# Altium PCB PCB_proyect.PcbDoc
Units mil, origin at the board's own origin, x right, y up, seen from the top; angles counter-clockwise.
Board outline 2370 x 1410.97 mil, 2 copper layers (Top Layer, Bottom Layer), stack 6.737 mil thick; 39 components, 36 nets, 164 pads, 73 vias.
Unrouted connection lines stored in the file: 39.
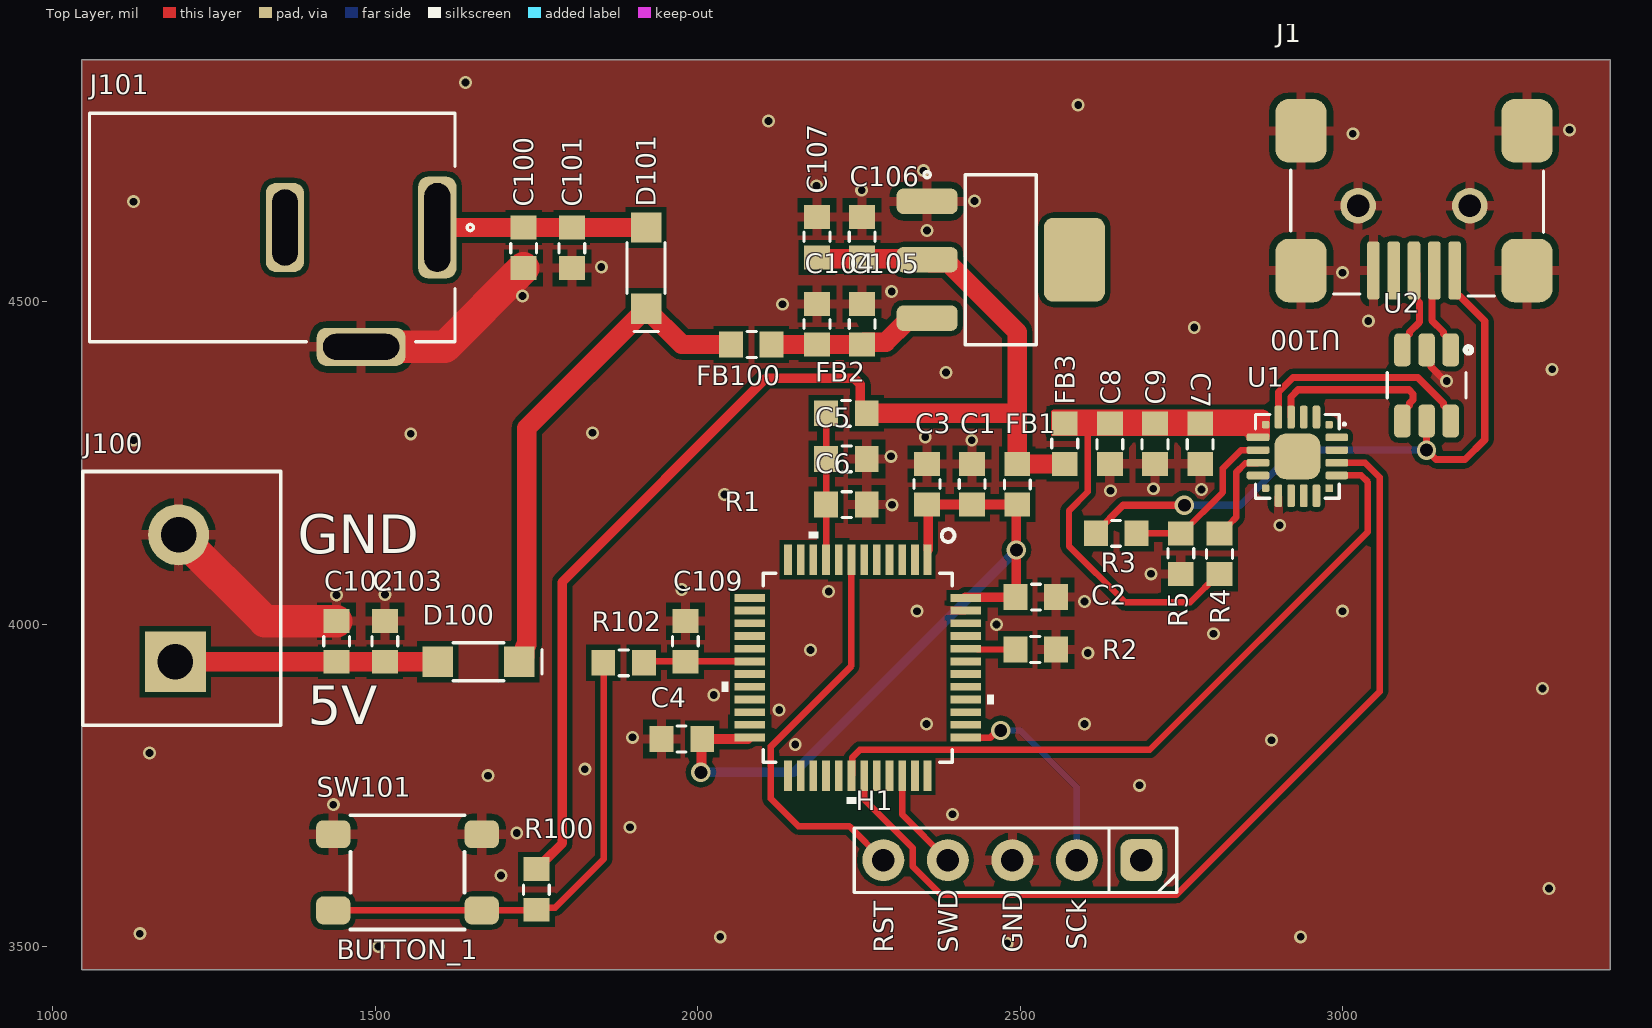
[diagram p0: Top Layer view]
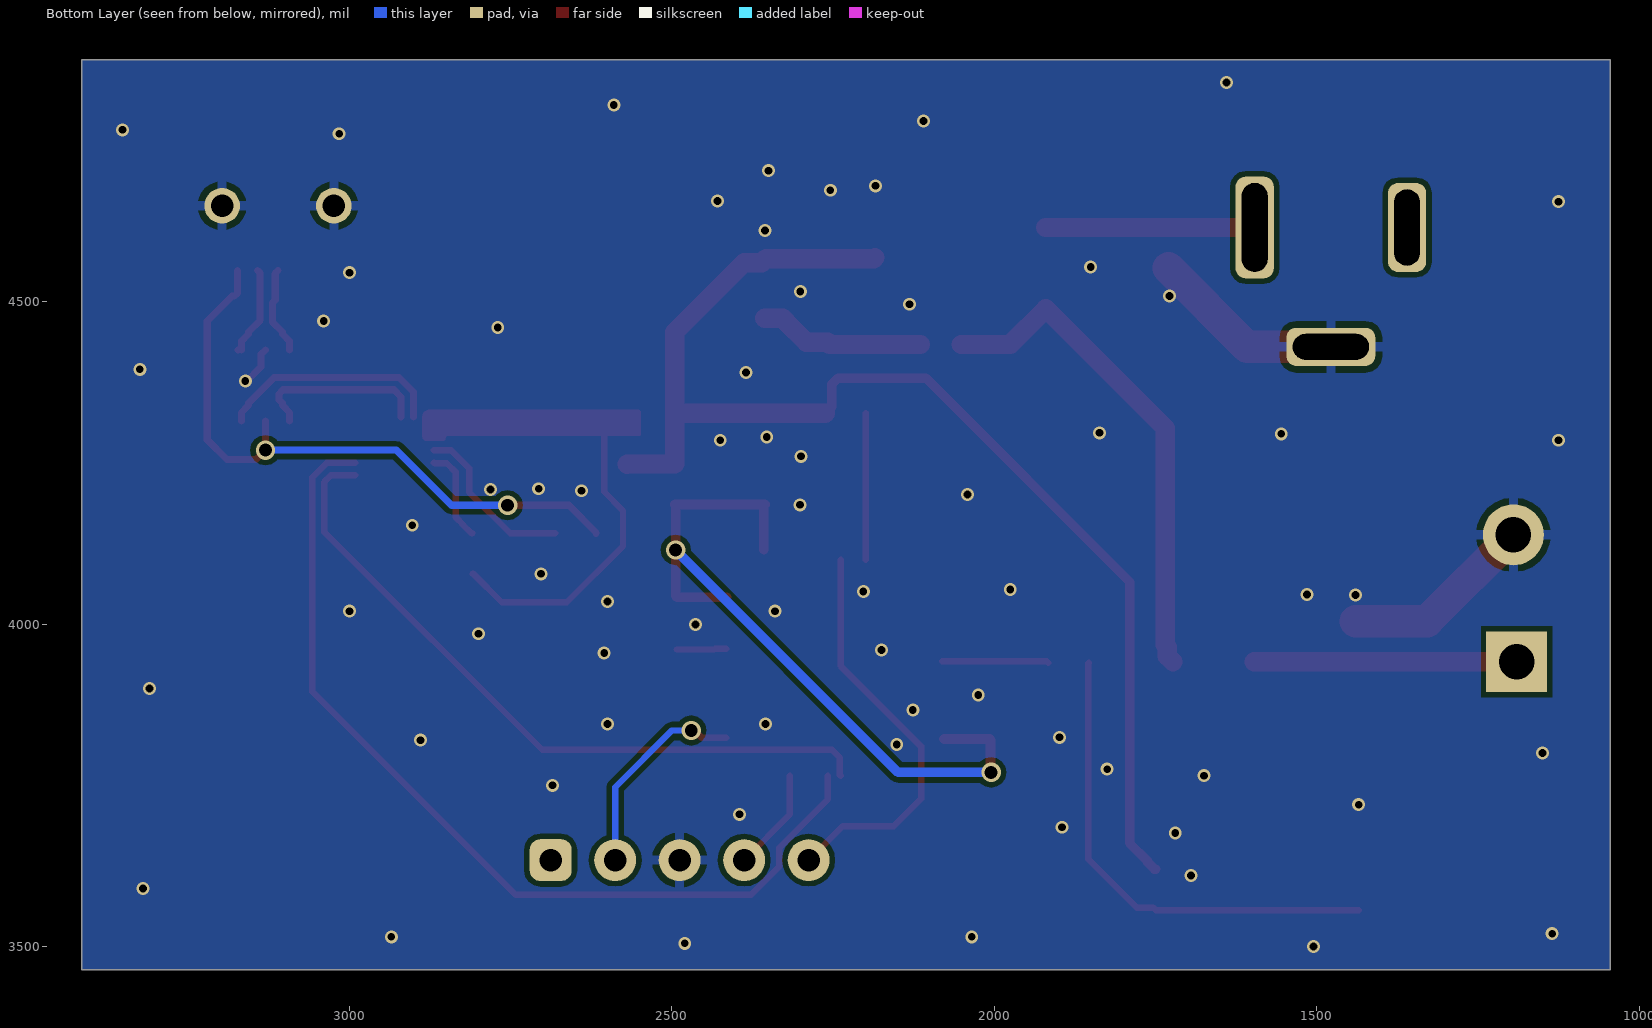
[diagram p1: Bottom Layer view, seen from below]
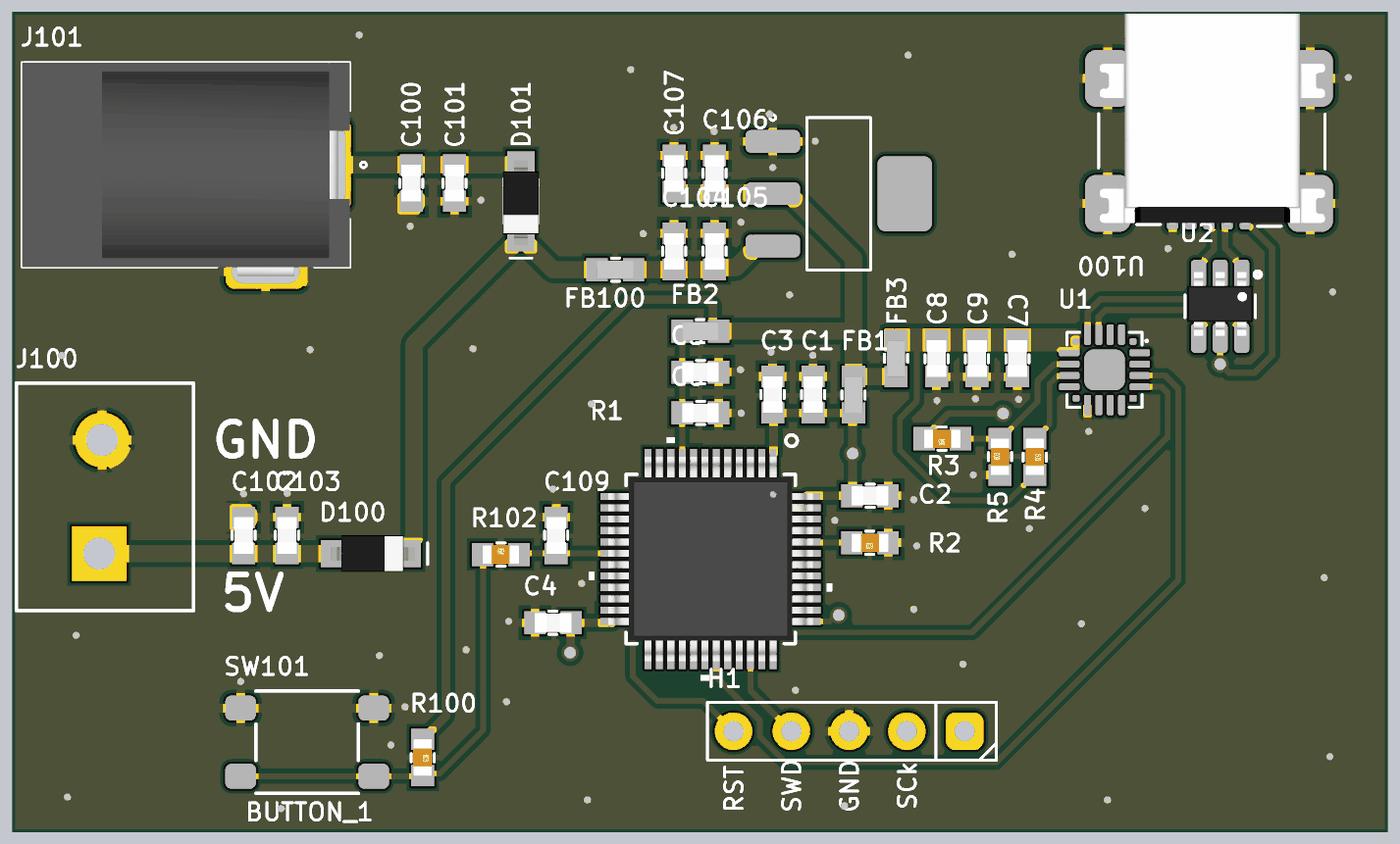
[diagram p2: 3D render of the assembled board from above, using the file's embedded part models]

## Layer stack, top to bottom
Top Solder: solder mask 0.4, Solder Resist, Dk 3.5
Top Layer: signal copper 1.4
Dielectric 1: dielectric 3.937, FR-4, Dk 4.6
Bottom Layer: signal copper 1.4
Bottom Solder: solder mask 0.4, Solder Resist, Dk 3.5

## Board outline
1045,3464.03 1045,4875 3415,4875 3415,3464.03

## Design rules (kind name [scope] priority, off if disabled: settings)
Clearance Clearance_MCU [InComponent('R1') OR InComponent('U1')] p1: gap=7 ignorepadtopadclearanceinfootprint=FALSE
Clearance [All] p2: gap=8 ignorepadtopadclearanceinfootprint=FALSE
DiffPairsRouting [All] p1: maxlimit=8 minlimit=8 mostfreqgap=8 toplayer_minwidth=11 toplayer_maxwidth=17.12 toplayer_prefwidth=17.12 bottomlayer_minwidth=11 bottomlayer_maxwidth=17.12 bottomlayer_prefwidth=17.12 impedanceprofiledriven=TRUE impedanceprofileid={F0EB9C77-73B7-45B8-9CEB-0A602036E387} impedanceprofilevalue=50.000000 maxuncoupledlength=500
HoleSize [All] p1: absolutevalues=TRUE maxlimit=100 minlimit=10 maxpercent=80.000 minpercent=20.000
MinimumSolderMaskSliver [All] p1: minsoldermaskwidth=1
PolygonConnect PolygonConnect_Via [IsVia] p1: connectstyle=Direct reliefconductorwidth=10 reliefentries=4 polygonreliefangle="90 Angle" airgapwidth=10
PolygonConnect [All] p2: connectstyle=Relief reliefconductorwidth=15 reliefentries=4 polygonreliefangle="90 Angle" airgapwidth=10
RoomDefinition POWER_LOADS [InComponentClass('POWER_LOADS')] p1: confinementstyle=ConfineIn formatcopy=TRUE lockcomponents=FALSE outline 155,0 7610,0 7610,5785 155,5785
RoomDefinition FLASH_UART [InComponentClass('FLASH_UART')] p2: confinementstyle=ConfineIn formatcopy=TRUE lockcomponents=FALSE outline 0,0 8090,0 8090,5830 0,5830
RoomDefinition MCU [InComponentClass('MCU')] p3: confinementstyle=ConfineIn formatcopy=TRUE lockcomponents=FALSE outline 0,0 10451.5,0 10451.5,5330 0,5330
RoutingVias [All] p1: holewidth=12 width=20 viastyle="Through Hole" minholewidth=12 minwidth=20 maxholewidth=28 maxwidth=50
SilkToSilkClearance [All] p1: silktosilkclearance=1
SilkToSolderMaskClearance [IsPad] p1: minsilkscreentomaskgap=1 clearancetoexposedcopper=TRUE
SolderMaskExpansion [All] p1: expansion=4 istentingtop=FALSE
Width Width_3v3 [InNet('3V3')] p1: maxlimit=60 minlimit=10 preferedwidth=30 minimp=50.000000 maximp=50.000000 favimp=50.000000
Width General_width [All] p2: maxlimit=100 minlimit=10 preferedwidth=10
25 further rules are at their usual default settings.

## Classes and differential pairs
component class POWER_LOADS: C100 C101 C102 C103 C104 C105 C106 C107 C109 D100 D101 FB100 J100 J101 R100 R102 SW101 U100
component class MCU: C1 C2 C3 C4 C5 C6 FB1 FB2 H1 R1 R2
component class FLASH_UART: C7 C8 C9 FB3 J1 R3 R4 R5 U1 U2
differential pair D: +NetJ1_3 -NetJ1_2
differential pair CP_D: +CP_D_P -CP_D_N

## Components (designator, comment, footprint, x,y, rotation, side; value= is the part's Value field where it differs from the comment)
C1 "22uF 6V3" 0603_cap 2425.59,4216.85 r90 top value=22uF
C2 "0.1uF 50V" 0603_cap 2524.09,4041.85 r0 top value=0.1uF
C3 "0.1uF 50V" 0603_cap 2355.59,4216.85 r90 top value=0.1uF
C4 "0.1uF 50V" 0603_cap 1975.59,3821.85 r180 top value=0.1uF
C5 "22uF 6V3" 0603_cap 2230.59,4256.1 r0 top value=22uF
C6 "0.1uF 50V" 0603_cap 2230.59,4185.35 r0 top value=0.1uF
C7 "10uF 10V" 0603_cap 2779.21,4279.55 r270 top value=10uF
C8 "0.1uF 50V" 0603_cap 2639.21,4279.55 r270 top value=0.1uF
C9 "0.1uF 50V" 0603_cap 2709.21,4279.55 r270 top value=0.1uF
C100 "10uF 10V" 0603_cap 1730,4583.5 r270 top value=10uF
C101 "0.1uF 50V" 0603_cap 1805,4583.5 r270 top value=0.1uF
C102 "10uF 10V" 0603_cap 1440,3973.07 r90 top value=10uF
C103 "0.1uF 50V" 0603_cap 1515,3973.07 r90 top value=0.1uF
C104 "10uF 10V" 0603_cap 2185,4465 r90 top value=10uF
C105 "0.1uF 50V" 0603_cap 2255,4465 r90 top value=0.1uF
C106 "10uF 10V" 0603_cap 2255,4600 r90 top value=10uF
C107 "0.1uF 50V" 0603_cap 2185,4600 r90 top value=0.1uF
C109 "0.1uF 50V" 0603_cap 1981.04,3973.07 r90 top value=0.1uF
D100 "40V 1A" SOD_123 1660,3941.57 r180 top
D101 "40V 1A" SOD_123 1920,4552.01 r90 top
FB1 "60OHM 2A" 0603_fb 2495.59,4216.85 r270 top value="60 OHM"
FB2 "60OHM 2A" 0603_fb 2230.59,4326.85 r180 top value="60 OHM"
FB3 "60OHM 2A" 0603_fb 2569.21,4279.55 r90 top value="60 OHM"
FB100 "60OHM 2A" 0603_fb 2083.21,4433.5 r0 top value="60 OHM"
H1 "H_5x1" H_5x1_TH_100mil 2487.94,3633.96 r270 top
J1 "USB Mini B" CON_5x1_SMD_miniUSB_B 3110.78,4656.55 r180 top
J100 "Connector 2pos" CON_2x1_TH_5MM 1200,4040 r90 top
J101 "PWR JACK 2.1mm" CON_POWER_BARREL_2.1MM_3CONN 1478.11,4615 r270 top
R1 "STM32F030C8T6TR" LQFP48_7x7mm 2248.27,3932.32 r270 top
R2 "10k 1/10W" 0603_res 2524.09,3960.6 r180 top value=10k
R3 "3k3 1/10W" 0603_res 2649.21,4140.71 r180 top value=3k3
R4 "10k 1/10W" 0603_res 2809.21,4109.21 r270 top value=10k
R5 "10k 1/10W" 0603_res 2749.21,4109.21 r90 top value=10k
R100 "1k 1/10W" 0603_res 1750,3588.5 r270 top value=1k
R102 "1k 1/10W" 0603_res 1885,3940 r0 top value=1k
SW101 "Sw" Sw_PUSH_4.5x4.5x5mm 1550,3615 r0 top
U1 "CP2102N-A02-GQFN20R" WFQFN_20_EP_3X3MM 2930,4260 r270 top
U2 "USBLC6-2SC6" SOT_23_6 3130.24,4370.13 r270 top
U100 "AMS1117-ADJ" SOT_223 2470,4565 r0 top

## Footprints (in the part's own frame and the unit in brackets; to place one, negate y for a bottom-side part, rotate by r counter-clockwise, add the part's x,y. Pads: shape width x height; smd on the part's side, far side on the other; paste and mask are expansions set on the pad)
0603_cap [mil]
  rect 37x40 smd: 1(-31.5,0) 2(31.5,0)
  silkscreen extent -7,-20 8,20, body extent -31,-17 31,17, height 34
0603_fb [mil]
  rect 37x40 smd: 1(-31.5,0) 2(31.5,0)
  silkscreen extent -7,-20 8,20, body extent -32,-16 31,16, height 32
0603_res [mil] "1608 Metric / 20190225 / C-A.Serna.A"
  rect 37x40 smd: 1(-31.5,0) 2(31.5,0)
  silkscreen extent -7,-20 8,20, body extent -31,-16 32,16, height 12
CON_2x1_TH_5MM [mm]
  rect 2.4x2.4 hole 1.4: 1(-2.5,0.254)
  round 2.4 hole 1.4: 2(2.5,0.127)
  silkscreen extent -5,-3.9 5,3.9, body extent -5,-3.9 5,3.9, height 10.2
CON_5x1_SMD_miniUSB_B [mm] "20190328 / V-A.Patino"
  rrect50% 2x2.5 smd: 0(-4.45,-2.75) 0(-4.45,2.75) 0(4.45,-2.75) 0(4.45,2.75)
  round 1.4 hole 0.889: 0(-2.2,0.2) 0(2.2,0.2)
  rrect50% 0.5x2.3 smd: 1(-1.6,2.75) 2(-0.8,2.75) 3(0,2.75) 4(0.8,2.75) 5(1.6,2.75)
  silkscreen extent -5.11,-1.2 4.85,3.76, body extent -5.1,-5.6 4.8,3.65, height 4
CON_POWER_BARREL_2.1MM_3CONN [mm]
  rrect50% 4x1.5 hole 1.016 slot 3.5 at 0 deg: 1(0,3)
  rrect50% 3.5x1.5 hole 1.016 slot 3 at 0 deg: 2(0,-3)
  rrect50% 1.5x3.5 hole 1.016 slot 3 at 90 deg: 3(4.7,0)
  silkscreen extent -4.5,-10.7 4.5,4.43, body extent -4.5,-10.7 4.9,3.7, height 11
H_5x1_TH_100mil [mil] "/ 20190222 / C-A.Serna.A"
  rrect50% 65x65 hole 35: 1(0,200)
  round 65 hole 35: 2(0,100) 3(0,0) 4(0,-100) 5(0,-200)
  silkscreen extent -50,-245 50,255
LQFP48_7x7mm [mil]
  rect 47x12 smd paste+0: 1(-167.32,108.27) 2(-167.32,88.58) 3(-167.32,68.9) 4(-167.32,49.21) 5(-167.32,29.53) 6(-167.32,9.84) 7(-167.32,-9.84) 8(-167.32,-29.53) 9(-167.32,-49.21) 10(-167.32,-68.9) 11(-167.32,-88.58) 12(-167.32,-108.27) 25(167.32,-108.27) 26(167.32,-88.58) 27(167.32,-68.9) 28(167.32,-49.21) 29(167.32,-29.53) 30(167.32,-9.84) 31(167.32,9.84) 32(167.32,29.53) 33(167.32,49.21) 34(167.32,68.9) 35(167.32,88.58) 36(167.32,108.27)
  rect 12x47 smd paste+0: 13(-108.27,-167.32) 14(-88.58,-167.32) 15(-68.9,-167.32) 16(-49.21,-167.32) 17(-29.53,-167.32) 18(-9.84,-167.32) 19(9.84,-167.32) 20(29.53,-167.32) 21(49.21,-167.32) 22(68.9,-167.32) 23(88.58,-167.32) 24(108.27,-167.32) 37(108.27,167.32) 38(88.58,167.32) 39(68.9,167.32) 40(49.21,167.32) 41(29.53,167.32) 42(9.84,167.32) 43(-9.84,167.32) 44(-29.53,167.32) 45(-49.21,167.32) 46(-68.9,167.32) 47(-88.58,167.32) 48(-108.27,167.32)
  silkscreen extent -215,-211 211,211, body extent -177,-177 177,177, height 63
SOD_123 [mm] "/ 20191030 / V-A.Patino"
  rect 1.2x1.2 smd: 1(-1.6,0) 2(1.6,0)
  silkscreen extent -2.5,-0.75 1,0.75, body extent -1.93,-0.8 1.77,0.8, height 1.28
SOT_23_6 [mm] "/ 20190225 / V-A.Patino"
  rrect50% 1.3x0.65 smd: 1(-1.4,0.95) 2(-1.4,0) 3(-1.4,-0.95) 4(1.4,-0.95) 5(1.4,0) 6(1.4,0.95)
  silkscreen extent -1.52,-1.55 0.5,1.78, body extent -1.5,-1.45 1.3,1.45, height 1.45
SOT_223 [mm] "TO-261-4, TO-261AA / 20220901/ V-A.Patino"
  rrect50% 2.4x1 smd: 1(-2.9,2.3) 2(-2.9,0) 3(-2.9,-2.3)
  rrect30% 2.4x3.3 smd: 4(2.9,0)
  silkscreen extent -3.02,-3.35 1.4,3.47, body extent -1.86,-3.35 1.86,3.35, height 1.8
Sw_PUSH_4.5x4.5x5mm [mm]
  rrect50% 1.35x1.1 smd: 1(-2.925,1.5) 1(2.925,1.5) 2(-2.925,-1.5) 2(2.925,-1.5)
  silkscreen extent -2.25,-2.25 2.25,2.25, body extent -2.25,-2.25 2.25,2.25, height 5
WFQFN_20_EP_3X3MM [mm] "QFN_20/ 20210809/ V-A.Patino"
  rrect50% 0.3x0.3 smd: 1(-1.25,1.25) 6(-1.25,-1.25) 11(1.25,-1.25)
  rrect50% 0.9x0.3 smd: 2(-1.55,0.75) 3(-1.55,0.25) 4(-1.55,-0.25) 5(-1.55,-0.75) 12(1.55,-0.75) 13(1.55,-0.25) 14(1.55,0.25) 15(1.55,0.75)
  rrect50% 0.3x0.9 smd: 7(-0.75,-1.55) 8(-0.25,-1.55) 9(0.25,-1.55) 10(0.75,-1.55) 17(0.75,1.55) 18(0.25,1.55) 19(-0.25,1.55) 20(-0.75,1.55)
  rect 0.3x0.3 smd: 16(1.25,1.25)
  rrect50% 1.8x1.8 smd: 21(0,0)
  silkscreen extent -1.65,-1.65 1.65,1.9, body extent -1.5,-1.5 1.5,1.5, height 0.8

## Part data
C1 C5: library part Cap_22uF_0805_6V3, "6.3V 22uF X5R ±20% 0805 Multilayer Ceramic Capacitors MLCC - SMD/SMT ROHS", Manufacturer="Samsung Electro-Mechanics", Manufacturer Part Number=CL21A226MQQNNNE, Supplier Part Number 1=C5674, ComponentLink1Description=LCSC, ComponentLink1URL=https://www.lcsc.com/product-detail/Multilayer-Ceramic-Capacitors-MLCC-SMD-SMT_Samsung-Electro-Mechanics-CL21A226MQQNNNE_C5674.html, Supplier 1=LCSC
C2 C3 C4 C6 C8 C9 C101 C103 C105 C107 C109: library part Cap_0.1uF_0603_50V, "50V 100nF Y5V -20%~+80% 0603 Multilayer Ceramic Capacitors MLCC - SMD/SMT ROHS", Manufacturer="Walsin Tech Corp", Manufacturer Part Number=0603F104Z500CT, Supplier Part Number 1=C83060, ComponentLink1Description=LCSC, ComponentLink1URL=https://www.lcsc.com/product-detail/Multilayer-Ceramic-Capacitors-MLCC-SMD-SMT_Walsin-Tech-Corp-0603F104Z500CT_C83060.html, Supplier 1=LCSC
  C109: Usage=NM
C7 C100 C102 C104 C106: library part Cap_10uF_0603_10V, "10V 10uF X5R ±10% 0603 Multilayer Ceramic Capacitors MLCC - SMD/SMT ROHS", Manufacturer=CCTC, Manufacturer Part Number=TCC0603X5R106K100CT, Supplier Part Number 1=C380314, ComponentLink1Description=LCSC, ComponentLink1URL=https://www.lcsc.com/product-detail/Multilayer-Ceramic-Capacitors-MLCC-SMD-SMT_CCTC-TCC0603X5R106K100CT_C380314.html, Supplier 1=LCSC
D100 D101: library part D_Schottky_40V_1A_SOD_123F, "DIODE SCHOTTKY 40V 1A SOD123F", Manufacturer="Shanghai Prisemi Elec", Manufacturer Part Number=PSBD1DF40V1H, Supplier Part Number 1=C110730, ComponentLink1Description=LCSC, ComponentLink1URL=https://www.lcsc.com/product-detail/Switching-Diode_Shanghai-Prisemi-Elec-PSBD1DF40V1H_C110730.html, Supplier 1=LCSC
FB1 FB2 FB3 FB100: library part FB_60_0603_2A, "2A 1 100mΩ 60Ω@100MHz ±25% 0603 Ferrite Beads ROHS", Manufacturer=TAI-TECH, Manufacturer Part Number=HCB1608KF-600T20, Supplier Part Number 1=C369516, ComponentLink1Description=LCSC, ComponentLink1URL=https://www.lcsc.com/product-detail/Ferrite-Beads_TAI-TECH-HCB1608KF-600T20_C369516.html, Supplier 1=LCSC
H1: library part H_Male_5x1_TH_100mil, "Debugging male pin", Last modified by=C-A.Serna.A, Last modified date=20190225
J1: library part Con_Mini_USB_B, "CONN RCPT USB2.0 MINI B SMD R/A", Manufacturer="EDAC Inc.", Manufacturer Part Number=KH-MINI-SMT-5P-Cu, Supplier Part Number 1=C2688795, ComponentLink1Description=LCSC, ComponentLink1URL=https://datasheet.lcsc.com/lcsc/2106070035_Shenzhen-Kinghelm-Elec-KH-MINI-SMT-5P-Cu_C2688795.pdf, Supplier 1=LCSC
J100: library part Con_2x1_TH_5mm, "2POS 5MM", Manufacturer=JILN, Manufacturer Part Number=JL126-50002G01, Supplier Part Number 1=C394556, ComponentLink1Description=Digi-Key, ComponentLink1URL=https://www.lcsc.com/product-detail/Screw-terminal_JILN-JL126-50002G01_C394556.html, Supplier 1=LCSC
J101: library part Con_Power_Jack_2.1mm_3pins, "CONN PWR JACK 2X5.5MM SOLDER", Manufacturer=HCTL, Manufacturer Part Number=HC-DC-005-2.0T, Supplier Part Number 1=C3010533, ComponentLink1Description=LCSC, ComponentLink1URL=https://www.lcsc.com/product-detail/AC-DC-Power-Connectors_HCTL-HC-DC-005-2-0T_C3010533.html, Supplier 1=LCSC
R1: library part IC_STM32F030C8T6TR_LQFP48_7x7MM, "IC MCU 32BIT 64KB FLASH 48LQFP", Manufacturer=STMicroelectronics, Supplier Part Number 1=C23922, ComponentLink1Description=LCSC, ComponentLink1URL=https://www.lcsc.com/product-detail/ST-Microelectronics_STMicroelectronics-STM32F030C8T6_C23922.html, Manufacturer Part Number=STM32F030C8T6TR, Supplier 1=LCSC
R2 R4 R5: library part Res_10k_0603_1/10W, "RES SMD 10k OHM 5% 1/10W 0603", Manufacturer=FOJAN, Manufacturer Part Number=FRC0603J103TS, Supplier Part Number 1=C2930027, ComponentLink1Description=LCSC, ComponentLink1URL=https://www.lcsc.com/product-detail/Chip-Resistor-Surface-Mount_FOJAN-FRC0603J103TS_C2930027.html, Supplier 1=LCSC
R3: library part Res_3k3_0603_1/10W, "RES SMD 3k3 OHM 5% 1/10W 0603", Manufacturer=FOJAN, Manufacturer Part Number="FRC0603J332 TS", Supplier Part Number 1=C2907140, ComponentLink1Description=LCSC, ComponentLink1URL=https://www.lcsc.com/product-detail/Chip-Resistor-Surface-Mount_FOJAN-FRC0603J332-TS_C2907140.html, Supplier 1=LCSC
R100 R102: library part Res_1k_0603_1/10W, "RES SMD 1k OHM 5% 1/10W 0603", Manufacturer=FOJAN, Manufacturer Part Number="FRC0603J102 TS", Supplier Part Number 1=C2907113, ComponentLink1Description=LCSC, ComponentLink1URL=https://www.lcsc.com/product-detail/Chip-Resistor-Surface-Mount_FOJAN-FRC0603J102-TS_C2907113.html, Supplier 1=LCSC
SW101: library part Sw_PUSH_4.5x4.5x5.0xmm, "SWITCH TACTILE SPST-NO 0.05A 12V", Manufacturer=BZCN, Manufacturer Part Number=TSC015A05026A, Supplier Part Number 1=C2888509, ComponentLink1Description=LCSC, ComponentLink1URL=https://www.lcsc.com/product-detail/Tactile-Switches_BZCN-TSC015A05026A_C2888509.html, Last modified by=N-A.Potosi, Last modified date=20190222, Supplier 1=LCSC
U1: library part IC_SGL_USB2UART-BRIDGE_20QFN, "IC USB TO UART BRIDGE QFN20", Manufacturer="Silicon Labs", Supplier Part Number 1=C969913, ComponentLink1Description=LCSC, ComponentLink1URL=https://www.lcsc.com/product-detail/USB-ICs_SILICON-LABS-CP2102N-A02-GQFN20R_C969913.html, Manufacturer Part Number=CP2102N-A02-GQFN20R, Supplier 1=LCSC
U2: library part TVS_5.25V_2CH_SOT_23_6, "TVS DIODE 5.25V 17V SOT23-6", Manufacturer=STMicroelectronics, Supplier Part Number 1=C7519, ComponentLink1Description=LCSC, ComponentLink1URL=https://www.lcsc.com/product-detail/ESD-Protection-Devices_STMicroelectronics-USBLC6-2SC6_C7519.html, Manufacturer Part Number=USBLC6-2SC6, Supplier 1=LCSC
U100: library part LDO_3V3_1A, "1A 70dB@(120Hz) 5mA 1.2V@1A Adjustable 1.2V~20V Positive 1 20V Output Adjustable SOT-223-3L Linear Voltage Regulators (LDO) ROHS", Manufacturer="WPMtek(Wei Pan Microelectronics)", Supplier Part Number=C2688238, ComponentLink1Description=LCSC, ComponentLink1URL=https://www.lcsc.com/product-detail/Linear-Voltage-Regulators-LDO_WPMtek-Wei-Pan-Microelectronics-AMS1117-ADJ_C2688238.html, Manufacturer Part Number=AMS1117-ADJ, Supplier=LCSC

## Via types
v1: diameter 20, hole 12, Top Layer to Bottom Layer, tented both sides, 68 vias
v2: diameter 30, hole 20, Top Layer to Bottom Layer, tented both sides, 5 vias

## Nets (pads, with @x,y where several pads share a name; then routed paths per layer and width w, separated by ;. In a path a pad name is that pad's centre, name@x,y a point inside that pad or via, vN(x,y) a via of type N, cw(c..) or ccw(c..) an arc to the next point about the centre after c; other vN are vias at no path point)
3V3: C106.1 C107.1 FB1.1 FB2.1 FB3.1 R100.1 U100.2 | length 1978.8
  Top Layer w15: R100.1 1751.5,3620 1762.5,3631 1762.5,3632.5 1790,3660 1790,4065 2106.3,4381.3 2242.39,4381.3 2252.3,4371.4 2252.3,4336.64 FB2.1
  Top Layer w30: C107.1 2186.75,4566.75 2354.08,4566.75 2360.51,4560.31 2388.07,4560.31 2495.74,4452.65 2495.74,4326.85 ; FB2.1 2495.74,4326.85 ; FB3.1 2569.06,4248.2 2495.74,4248.2 2495.74,4326.85
BOOT: R1.44 R2.2 | length 77.5
  Top Layer w10: R1.44 2433.09,3961.85 2434.34,3960.6 R2.2
BUTTON_2: R1.40
BUTTON_3: R1.41
BUZZER: R1.10
CP_D_N: U1.5 U2.6 | length 352.8
  Top Layer w11: U1.5 2900.82,4321.37 2900.82,4360.11 2923.08,4382.37 3116.62,4382.37 3156.54,4342.44 3156.54,4339.39 3167.64,4328.29 U2.6
CP_D_P: U1.4 U2.4 | length 276.9
  Top Layer w11: U1.4 2919.82,4321.37 2919.82,4352.24 2930.95,4363.37 3102.88,4363.37 3109.33,4356.93 3109.33,4347.82 3103.95,4342.44 3103.95,4339.4 3092.84,4328.29 U2.4
GND: C1.2 C2.2 C3.2 C4.2 C5.2 C6.2 C7.2 C8.2 C9.2 C100.2 C101.2 C102.2 C103.2 C104.2 C105.2 C106.2 C107.2 C109.2 H1.3 J1.0 J1.5 J100.2 J101.3 R1.8 R1.23 R1.47 R2.1 R5.1 SW101.1 U1.3 U1.12 U1.21 U2.2 U100.1 | length 665.5
  Top Layer w11: U2.2 3136.98,4418.5 3136.98,4399.04 3159.03,4376.99 v1(3161.43,4376.99)
  Top Layer w50: J100.2 1328.85,4004.57 C102.2 ; J101.3 1607.96,4429.96 C100.2
  other v1: 1505,3500 2480,3505 2035,3515 2935,3515 1135,3520 3320,3590 1695,3610 1719.36,3676.1 1895,3685 2395,3705 1435,3720 2685,3750 1675,3765 1825,3775 1150,3800 2151.37,3813.45 2890,3820 1898.76,3824.37 2355,3845 2600,3845 2126.32,3866.86 2025,3890 3310,3900 2605,3955 2175,3960 2800,3985 2463.3,3999.2 2340,4020 3000,4020 2600,4035 1440,4045 1515.28,4046.07 2203.08,4050.47 1975.27,4053.54 2702.88,4077.86 2902.56,4153.28 2301.28,4184.89 2041.74,4200.9 2639.99,4206.77 2781.29,4208.75 2706.65,4209.82 2299.74,4260.09 1125,4285 2425.07,4285.15 2352.95,4290.27 1555,4295 1837.05,4296.55 2385,4390 3325,4395 2770,4460 3040,4470 2131.44,4495.91 1728.34,4508.7 2300.77,4515.86 3000,4545 1850.6,4553.72 2355.78,4610.31 1125,4655 2429.44,4656.12 2254.27,4672.83 2184.32,4679.64 2350.21,4703.16 3015.95,4760.32 3351.95,4766.45 2110,4780 2590,4805 1640,4840
I2C1_SCL: R1.42
I2C_SDA: R1.43
LED_RGB_1: R1.32
LED_RGB_2: R1.33
NetC104_1: C104.1 C105.1 FB100.2 U100.3 | length 258.4
  Top Layer w30: FB100.2 C104.1 C105.1 2258.5,4437 2291.38,4437 2323.58,4469.2 2323.58,4469.76 2328.27,4474.45 U100.3
NetC109_1: C109.1 R1.18 R102.2 | length 165.3
  Top Layer w10: R102.2 1918.67,3942.17 R1.18
NetJ1_2: J1.2 U2.1 | length 136.9
  Top Layer w11: J1.2 3138.41,4544.42 3138.41,4470.81 3156.54,4452.68 3156.54,4449.63 3167.64,4438.52 U2.1 ; U2.1@3172.4,4425.12 U2.1@3172.4,4425.24
NetJ1_3: J1.3 U2.3 | length 137.6
  Top Layer w11: U2.3 3092.84,4438.52 3103.95,4449.63 3103.95,4452.68 3119.41,4468.14 3119.41,4498.49 3115.12,4502.78 3115.12,4543.94 J1.3
NetR4_1: R4.1 U1.9 | length 146.3
  Top Layer w10: R4.1 2810.71,4140.71 2824.21,4154.21 2824.21,4154.75 2834.83,4165.37 2834.83,4235.19 2848.89,4249.25 2868.07,4249.25 U1.9
NetR100_2: R100.2 R102.1 SW101.2 | length 757.2
  Top Layer w10: SW101.2@1434.84,3555.94 1665.16,3555.94 1748.94,3555.94 1753.46,3560.46 1779.14,3560.46 1854.37,3635.69 1854.37,3939.13 R102.1
RST: H1.5 R1.7 | length 635.9
  Top Layer w10: R1.7 2238.43,3935.06 2113.6,3810.24 2113.6,3729.19 2156.2,3686.58 2235.32,3686.58 H1.5
RX_MCU: R1.31 U1.18 | length 1453
  Top Layer w10: R1.31 2258.11,3728.14 2333.44,3652.81 2333.44,3624.11 2377.55,3580 2742.14,3580 3057.34,3895.2 3057.34,4227.73 3034.91,4250.16 U1.18
SPI1_MISO: R1.16
SPI1_MOSI: R1.17
SPI1_SCK: R1.15
SWCLK: H1.2 R1.37 | length 326.4
  Top Layer w10: R1.37 2454.09,3824.06 2465.04,3835 v2(2470,3835)
  Bottom Layer w10: v2(2470,3835) 2500,3835 2587.94,3747.06 H1.2
SWDIO: H1.4 R1.34 | length 160.4
  Top Layer w10: R1.34 2317.17,3704.74 H1.4
TEMP_SEN_2: R1.13
TEMP_SENS: R1.11
TX_MCU: R1.30 U1.17 | length 1102.8
  Top Layer w10: R1.30 2239.43,3766 2239.43,3792.79 2251.64,3805 2700.94,3805 3039.34,4143.4 3039.34,4220.27 3029.14,4230.47 U1.17
VBUS: J1.1 R3.2 U2.5 | length 1005.2
  Top Layer w11: R3.2 2617.71,4142.21 2659.78,4184.28 v2(2754.68,4184.28) ; U2.5 v2(3130.25,4269.75) 3145,4255 3189.71,4255 3220.44,4285.74 3220.44,4469.86 3181.79,4508.51 3178.11,4508.51 3173.77,4512.85 J1.1
  Bottom Layer w11: v2(2754.68,4184.28) 2841.98,4184.28 2927.45,4269.75 v2(3130.25,4269.75)
VBUS_CP21: R3.1 R5.2 U1.8 | length 263.5
  Top Layer w10: R3.1 R5.2 2750.71,4140.71 2814.21,4204.21 2814.21,4241.32 2842.74,4269.84 U1.8
VDD_CP: C7.1 C8.1 C9.1 FB3.2 R4.2 U1.6 U1.7 | length 488.9
  Top Layer w10: 2605,4310 2605,4205 2575.84,4175.84 2575.84,4120.82 2662.94,4033.72 2763.72,4033.72 2807.71,4077.71 R4.2
VDD_MCU: C1.1 C2.1 C3.1 C4.1 FB1.2 R1.1 R1.24 R1.48 | length 1188.4
  Top Layer w15: v2(2005,3770) 2006.05,3771.05 2006.05,3820.81 C4.1 R1.24@2078.15,3821.85 ; R1.1@2357.46,4115.65 2357.46,4183.48 C3.1 C1.1 FB1.2 2494.09,4183.85 v2(2494.09,4115) 2494.09,4043.35 C2.1 R1.48@2415.23,4041.85
  Bottom Layer w15: v2(2005,3770) 2149.09,3770 v2(2494.09,4115)
VDDA_MCU: C5.1 C6.1 FB2.2 R1.9 | length 227.2
  Top Layer w10: R1.9 2199.06,4326.81 FB2.2
VIN: D100.1 D101.1 FB100.1 | length 783.8
  Top Layer w30: D100.1 1731.61,3950.2 1731.61,3964.38 1735,3967.77 1735,4304.02 D101.1 1975.52,4433.5 FB100.1
VIN_BORNER: C102.1 C103.1 D100.2 J100.1 | length 407
  Top Layer w30: J100.1 C102.1 C103.1 D100.2
VIN_JACK: C100.1 C101.1 D101.2 J101.1 | length 323.8
  Top Layer w30: J101.1 C100.1 C101.1 D101.2
pads on no net: H1.1 J1.4 J101.2 R1.2 R1.3 R1.4 R1.5 R1.6 R1.12 R1.14 R1.19 R1.20 R1.21 R1.22 R1.25 R1.26 R1.27 R1.28 R1.29 R1.35 R1.36 R1.38 R1.39 R1.45 R1.46 U1.1 U1.2 U1.10 U1.11 U1.13 U1.14 U1.15 U1.16 U1.19 U1.20 U100.4

## Polygon pours and split planes (outlines as drawn)
GND on Bottom Layer "GND_BOT" (solid, remove dead copper, pour order 1): 1045,3464.03 1045,4875 3415,4875 3415,3464.03
GND on Top Layer "GND_TL" (solid, remove dead copper, pour order 0): 1045,3464.03 1045,4875 3415,4875 3415,3464.03

## Other copper
Top Layer:
  region net VDD_CP: 2879.21,4284.21 2880.59,4284.21 ccw(c2880.59,4290.39) 2886.77,4290.39 2886.77,4322.8 ccw(c2877.48,4322.8) 2877.48,4332.1 2551.82,4332.1 ccw(c2551.82,4328.53) 2548.26,4328.53 2548.26,4293.67 ccw(c2549.85,4293.67) 2549.85,4292.08 2846.28,4292.08 cw(c2846.28,4287.17) 2851.19,4287.17 ccw(c2854.05,4287.17) 2854.05,4284.31 2858.71,4284.31

## Silkscreen, mask and mechanical layers (free items; w line width, h text height)
Top Overlay:
  text "GND" at 1380,4110 h60
  text "5V" at 1395,3845 h60
  text "SCk" at 2602.94,3495 h30 r90
  text "RST" at 2302.94,3490 h30 r90
  text "SWD" at 2402.94,3490 h30 r90
  text "GND" at 2502.94,3490 h30 r90
  text "BUTTON_1" at 1440,3480 h30
Board Shape:
  the board outline again, w10